# EAGLE board plugV6-Relay-NC_5x5cm_SMD0805 (EAGLE 7.5.0)
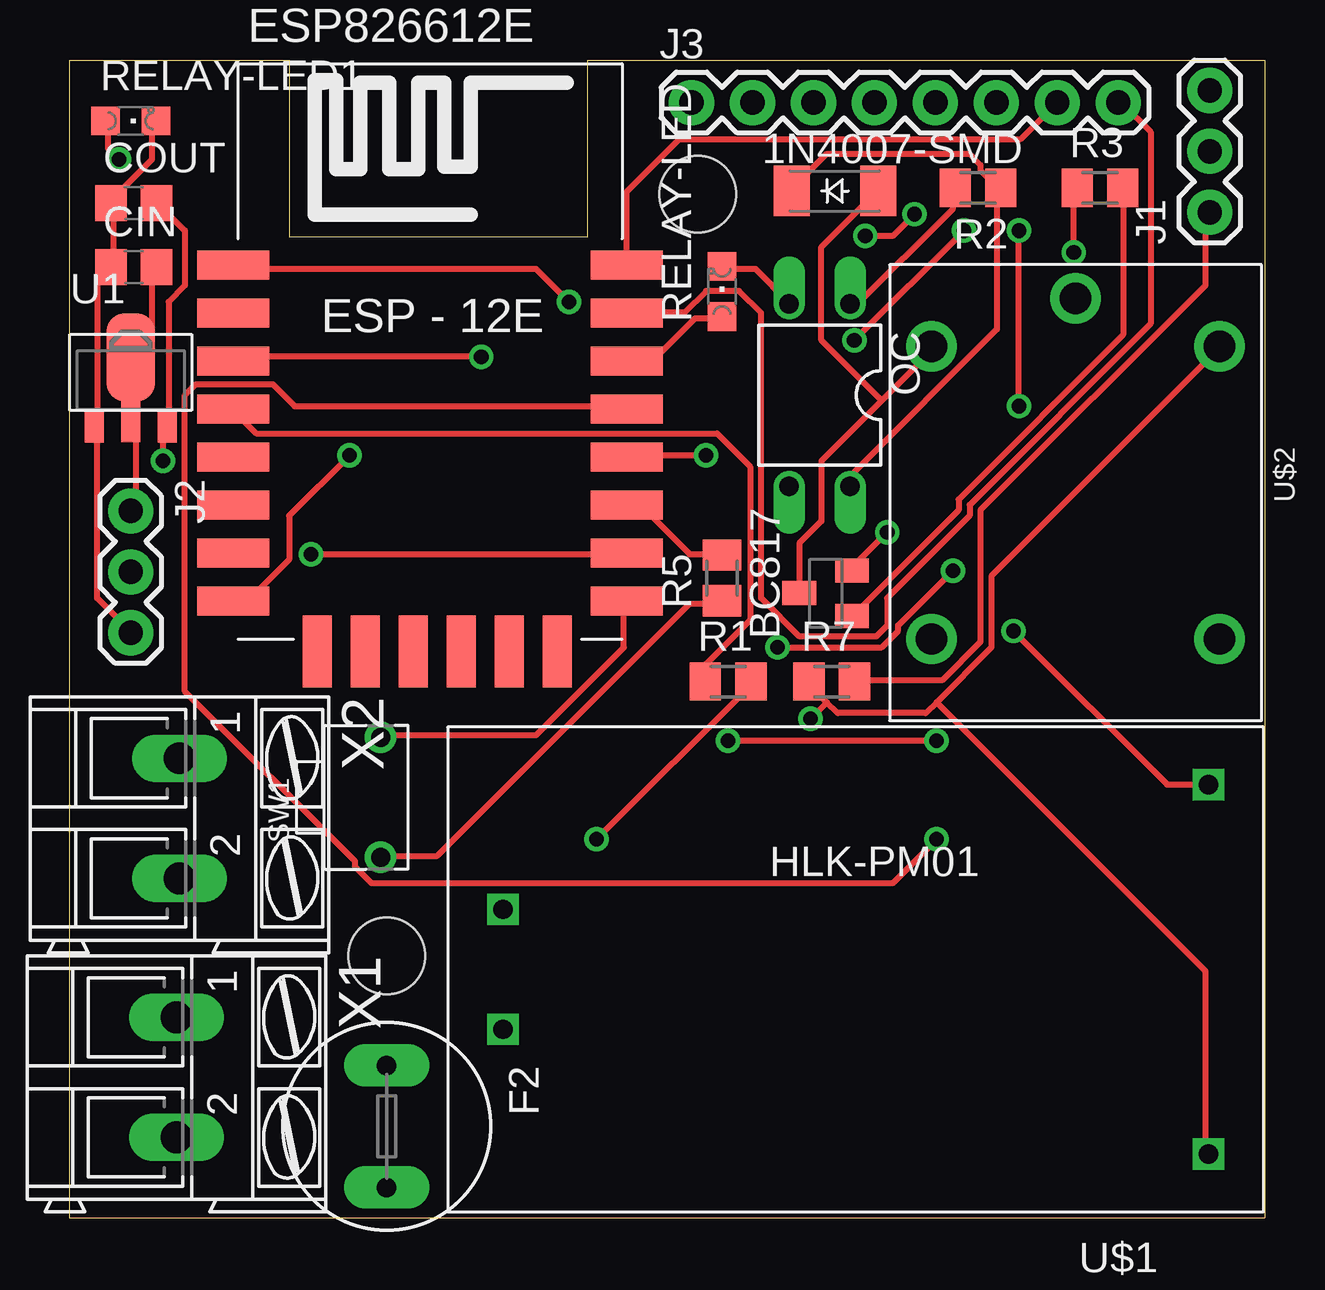
[diagram p0: board, top side]
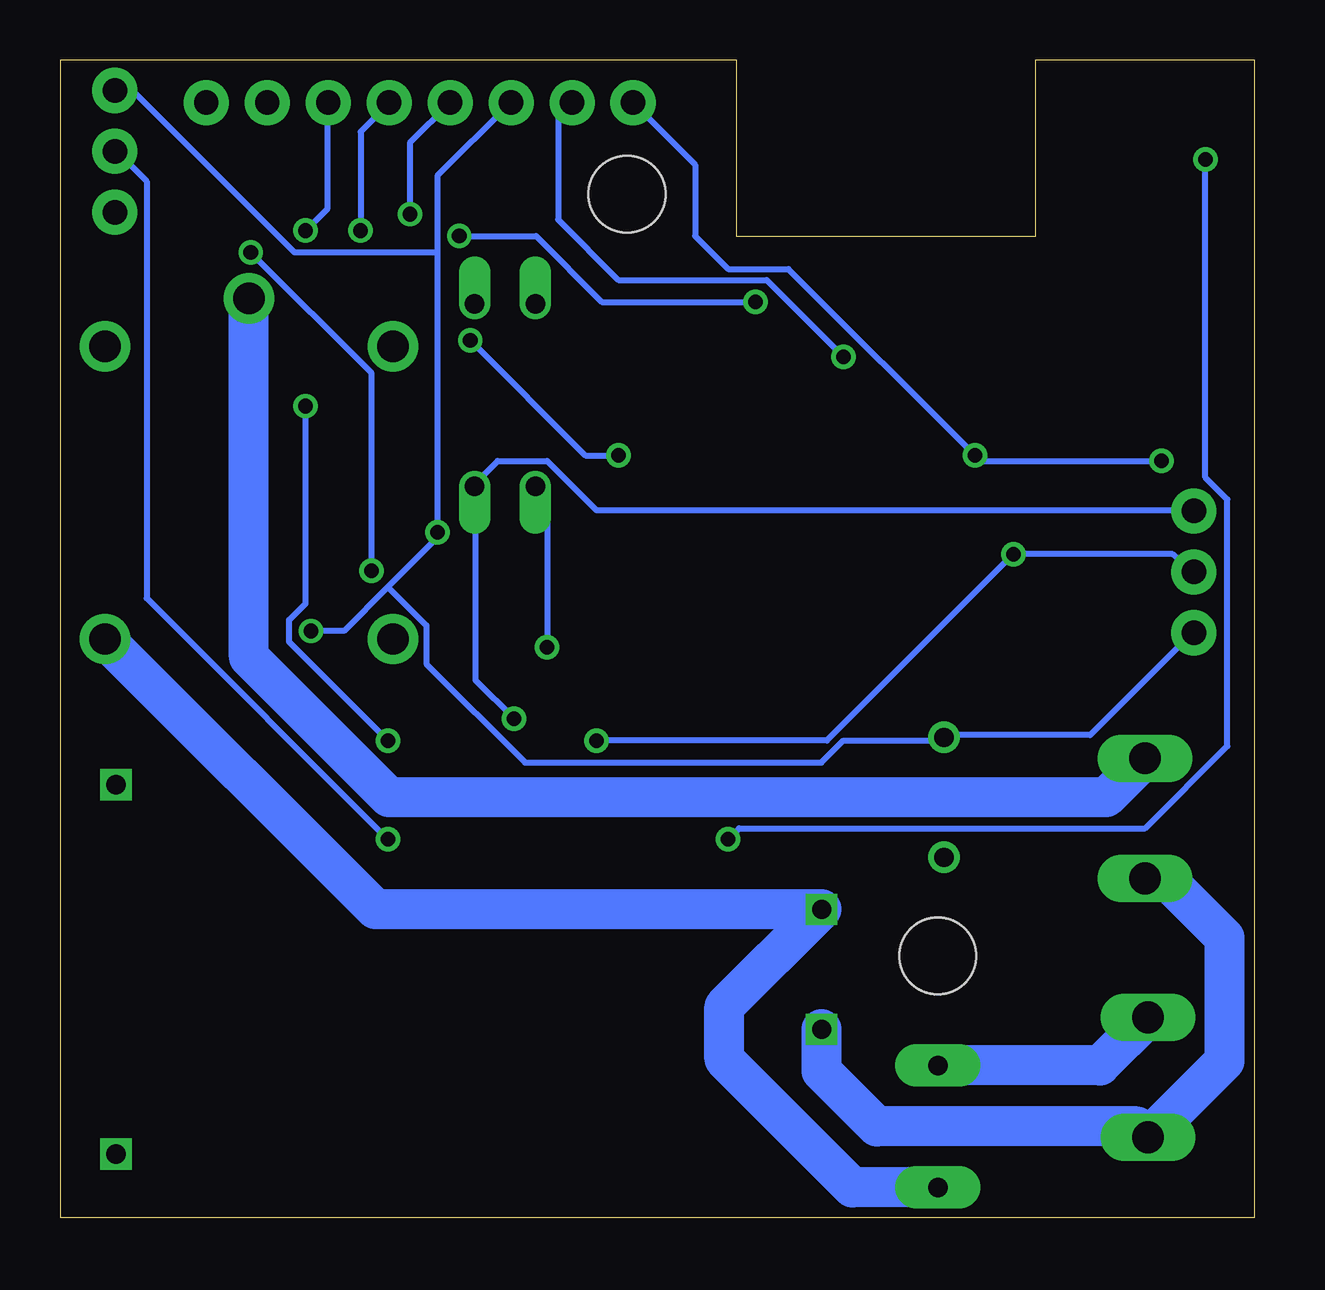
[diagram p1: board, bottom side, seen from below]

Size 49.78 x 48.26 mm. Coordinates in mm from the lower left corner, seen from the top.
Outline: 0,0 49.78,0 49.78,48.26 21.59,48.26 21.59,40.89 9.14,40.89 9.14,48.26 0,48.26 0,0
Copper layers (1*16): Top 0.035mm / dielectric 1.5mm / Bottom 0.035mm
Design rules "default": minimum track width 10mil, minimum drill 24mil, track to track 8mil, track to pad 8mil, pad to pad 8mil, via to via 8mil, smd to smd 8mil, copper to edge 40mil, drill to drill 8mil, minimum pad ring 10mil, minimum via ring 8mil, stop-mask expansion 4mil, vias tented up to drill 0mil, thermal gap 10mil
Holes 3.2 mm at 13.21,10.92 26.16,42.67

## Footprints (pad centres in the part's own frame; a part is rotated, then mirrored left to right if it is on the bottom)
SOD-123_MINI-SMA = smd 1.5 x 2.1: A 1.8,0; C -1.8,0
SOT23-BEC = smd 1 x 1.4: B -0.95,-1.1; C 0,1.1; E 0.95,-1.1
C0805 = smd 1.3 x 1.5: 1 -0.95,0; 2 0.95,0
ESP12E-SMD = smd 3 x 1.2: ADC -8.3,3.8; CH_PD -8.3,1.8; GND 8.1,-8.2; GPIO0 8.1,-2.2; GPIO2 8.1,-4.2; GPIO4 8.1,-0.2; GPIO5 8.1,1.8; GPIO12 -8.3,-4.2; GPIO13 -8.3,-6.2; GPIO14 -8.3,-2.2; GPIO15 8.1,-6.2; GPIO16 -8.3,-0.2; RESET -8.3,5.8; RXD0 8.1,3.8; TXD0 8.1,5.8; VCC -8.3,-8.2 | smd 1.2 x 3: CS0 -4.8,-10.3; GPIO9 -0.8,-10.3; GPIO10 1.2,-10.3; MISO -2.8,-10.3; MOSI 3.2,-10.3; SCLK 5.2,-10.3
TR5 = drill 0.813 pad 1.778 long: 1 -2.54,0; 2 2.54,0
1X03 = drill 1.016 pad 1.88: 1 0,0; 2 2.54,0; 3 5.08,0
1X08_ROUND = drill 1.016 pad 1.88: 1 0,0; 2 2.54,0; 3 5.08,0; 4 7.62,0; 5 10.16,0; 6 12.7,0; 7 15.24,0; 8 17.78,0
DIL04 = drill 0.813 offset: 1 -1.27,-3.81; 2 1.27,-3.81; 3 1.27,3.81; 4 -1.27,3.81
M0805 = smd 1.3 x 1.6: 1 -0.95,0; 2 0.95,0
CHIPLED_0805 = smd 1.2 x 1.2: A 0,-1.05; C 0,1.05
SW2-5.0-6.0X3.0X4.3MM = drill 0.8 pad 1.27: 1 -2.5,0; 2 2.5,0
SOT89 = smd 0.8 x 1.4: 1 -1.524,-1.905; 3 1.524,-1.905 | smd 0.8 x 1.9: 2 0,-1.651 | smd 2.032 x 3.65: 4 0,0.94
HLK-PM01 = drill 0.8 square: +5V 15.19,-7.76; AC1 -14.21,2.44; AC2 -14.21,-2.56; GND 15.19,7.64
RELAY-SONGLE = drill 1.3 pad 2.1: COM -8.1,0; NC 6.1,6; NO 6.1,-6; V+ -6.1,6; V- -6.1,-6
AK300/2 = drill 1.321 long: 1 -2.515,0; 2 2.489,0

## Placement (x,y rotation side)
1N4007-SMD  CGRM4007-G  [SOD-123_MINI-SMA]  31.88,42.8 0 top
BC817  SOT23  [SOT23-BEC]  31.5,26.04 90 top
CIN  1uF  [C0805]  2.67,39.62 0 top
COUT  1uF  [C0805]  2.67,42.29 0 top
ESP826612E  Value  [ESP12E-SMD]  15.11,33.91 0 top
F2  [TR5]  13.21,3.81 270 top
J1  [1X03]  47.5,41.91 90 top
J2  [1X03]  2.54,29.46 270 top
J3  [1X08_ROUND]  25.91,46.48 0 top
OC  PC817  [DIL04]  31.24,34.29 180 top
R1  230  [M0805]  27.43,22.35 0 top
R2  1k  [M0805]  37.85,42.93 180 top
R3  470  [M0805]  42.93,42.93 0 top
R5  470  [M0805]  27.18,26.67 90 top
R7  230  [M0805]  31.75,22.35 0 top
RELAY-LED  [CHIPLED_0805]  27.18,38.61 0 top
RELAY-LED1  ESP-LED  [CHIPLED_0805]  2.54,45.72 270 top
SW1  [SW2-5.0-6.0X3.0X4.3MM]  12.95,17.53 90 top
U1  XC6206PR  [SOT89]  2.54,34.92 0 top
U$1  HLK-PM01  [HLK-PM01]  32.26,10.41 0 top
U$2  RELAY-SONGLE  [RELAY-SONGLE]  41.91,30.23 270 top
X1  220V  [AK300/2]  4.45,5.84 270 top
X2  Plug  [AK300/2]  4.57,16.64 270 top

## Library data of the parts
1N4007-SMD = diode
BC817 = transistor-neu-to92
CIN COUT R1-R3 R5 R7 = rcl
ESP826612E = esp8266modules
F2 = fuse; OC_FARNELL: unknown; OC_NEWARK: unknown
J1 J2 = SparkFun-Connectors
J3 = SparkFun-Connectors; PROD_ID: CONN-08437
OC = optocoupler; MPN: PC817X4J000F; OC_FARNELL: 9707727; OC_NEWARK: 97K7059
RELAY-LED RELAY-LED1 = led
SW1 = Seeed-OPL-Switch
U1 = IC
U$1 = HLK-PM01
U$2 = Seeed-OPL-Relay
X1 X2 = con-ptr500; OC_FARNELL: unknown; OC_NEWARK: unknown

## Nets
+5V: 1N4007-SMD.C CIN.2 J2.1 OC.4 R2.1 R7.1 U1.2 U1.4 U$1.+5V U$2.V+
EN: ESP826612E.CH_PD J3.2
GND: BC817.E CIN.1 COUT.1 ESP826612E.GND J1.3 J2.3 J3.3 RELAY-LED1.C SW1.2 U1.1 U$1.GND
GPIO0: ESP826612E.GPIO0 J3.5
GPIO2: ESP826612E.GPIO2 R5.2
GPIO4: ESP826612E.GPIO4 J1.2
GPIO5: ESP826612E.GPIO5 RELAY-LED.A
GPIO12: ESP826612E.GPIO12
GPIO13: ESP826612E.GPIO13
GPIO14: ESP826612E.GPIO14
GPIO15: ESP826612E.GPIO15 J2.2 J3.6
GPIO16: ESP826612E.GPIO16 R1.1
N$1: F2.2 U$1.AC1 U$2.NC
N$2: OC.3 R3.1
N$3: U$1.AC2 X1.2 X2.2
N$4: U$2.COM X2.1
N$5: BC817.B R3.2
N$6: OC.2 RELAY-LED.C
N$7: R5.1 SW1.1
N$8: R1.2 RELAY-LED1.A
N$9: J1.1 R7.2
N$10: F2.1 X1.1
N$13: OC.1 R2.2
N$18: 1N4007-SMD.A BC817.C U$2.V-
RST: ESP826612E.RESET J3.4
RX: ESP826612E.RXD0 J3.8
TX: ESP826612E.TXD0 J3.7
V33: COUT.2 ESP826612E.VCC J3.1 U1.3

## Tracks (layer width: path | path; a pad name or v marks a point on that pad's centre or on a via)
+5V  (via drill 0.61)
  Top 0.254: CIN.2 3.43,39.55 3.43,36.58 2.74,35.89 U1.4 2.52,35.66 2.52,33.38 U1.2 2.74,33.15 2.74,29.49 J2.1 | 1N4007-SMD.C 30.18,42.98 31.55,44.35 37.49,44.35 37.95,43.89 37.95,43.66 38.63,42.98 R2.1 38.63,42.75 38.63,37.03 32.69,31.09 32.69,30.63 OC.4 | 31.55,21.49 32,21.03 35.66,21.03 36.12,21.49 | 31.55,21.49 30.86,22.17 R7.1 | 36.12,21.49 38.41,23.77 38.41,26.75 47.78,36.12 U$2.V+ | 36.12,21.49 47.32,10.29 47.32,2.74 U$1.+5V | 31.55,21.49 v30.86,20.8
  Bottom 0.254: J2.1 2.74,29.49 27.43,29.49 29.49,31.55 31.55,31.55 32.46,30.63 OC.4 32.46,30.4 32.46,22.4 v30.86,20.8
EN  (via drill 0.61)
  Top 0.254: v17.14,35.89 6.86,35.89 ESP826612E.CH_PD
  Bottom 0.254: v17.14,35.89 20.34,39.09 26.52,39.09 29.03,41.6 29.03,45.95 28.57,46.41 J3.2
GND  (via drill 0.61)
  Top 0.254: RELAY-LED1.C 3.43,45.72 3.43,44.12 1.6,42.29 COUT.1 1.83,42.29 1.83,39.78 CIN.1 1.6,39.55 1.14,39.09 1.14,33.15 U1.1 1.14,32.92 1.14,25.83 2.52,24.46 J2.3 | ESP826612E.GND 23.09,25.6 23.09,23.77 19.43,20.12 13.03,20.12 SW1.2 | v34.06,28.57 32.69,27.2 BC817.E | v39.32,24.46 45.72,18.06 47.32,18.06 U$1.GND
  Bottom 0.254: J2.3 2.74,24.23 6.86,20.12 12.8,20.12 SW1.2 13.03,19.89 17.14,19.89 18.06,18.97 30.4,18.97 34.52,23.09 34.52,24.69 36.12,26.29 | 34.06,40.23 34.06,43.43 31.09,46.41 J3.3 | 34.06,40.23 v34.06,28.57 34.06,28.35 36.12,26.29 | v39.32,24.46 37.95,24.46 36.12,26.29 | 34.06,40.23 40.01,40.23 46.63,46.86 47.32,46.86 J1.3
GPIO0  (via drill 0.61)
  Top 0.254: v26.52,31.77 23.32,31.77 ESP826612E.GPIO0 | v37.26,41.15 v32.69,36.58
  Bottom 0.254: v26.52,31.77 27.89,31.77 v32.69,36.58 | v37.26,41.15 37.26,45.26 36.12,46.41 J3.5
GPIO2
  Top 0.254: R5.2 26.98,27.66 25.83,27.66 24,29.49 23.32,29.49 ESP826612E.GPIO2
GPIO4  (via drill 0.61)
  Top 0.254: v36.12,15.77 34.29,13.95 12.57,13.95 11.89,14.63 11.89,14.86 4.8,21.95 4.8,34.29 5.26,34.75 8.46,34.75 9.37,33.83 23.09,33.83 ESP826612E.GPIO4
  Bottom 0.254: v36.12,15.77 46.18,25.83 46.18,43.2 47.32,44.35 J1.2
GPIO5
  Top 0.254: RELAY-LED.A 26.98,37.49 26.06,37.49 24.46,35.89 23.32,35.89 ESP826612E.GPIO5
GPIO15  (via drill 0.61)
  Top 0.254: v10.06,27.66 23.09,27.66 ESP826612E.GPIO15 | v39.55,33.83 v39.55,41.15 | v27.43,19.89 v36.12,19.89
  Bottom 0.254: J2.2 2.74,26.98 3.43,27.66 v10.06,27.66 17.83,19.89 v27.43,19.89 | v39.55,41.15 38.63,42.06 38.63,46.41 J3.6 | v39.55,33.83 39.55,25.6 40.23,24.92 40.23,24 v36.12,19.89
GPIO16
  Top 0.254: R1.1 26.52,22.4 26.52,23.09 28.35,24.92 28.35,31.32 26.98,32.69 7.77,32.69 6.86,33.6 ESP826612E.GPIO16
N$1
  Bottom 1.676: F2.2 16.76,1.27 22.1,6.6 22.1,8.8 U$1.AC1 36.64,12.85 U$2.NC
N$2  (via drill 0.61)
  Top 0.254: v41.83,40.23 41.83,42.75 R3.1 | v36.8,26.98 34.52,24.69 34.52,24.46 33.83,23.77 v29.49,23.77
  Bottom 0.254: v41.83,40.23 36.8,35.2 v36.8,26.98 | v29.49,23.77 29.49,29.95 29.95,30.4 OC.3
N$3
  Bottom 1.676: X2.2 3.73,14.15 1.27,11.68 1.27,6.53 X1.2 4.9,3.81 15.75,3.81 18.05,6.11 U$1.AC2
N$4
  Bottom 1.676: X2.1 6.2,17.53 36.07,17.53 41.91,23.37 U$2.COM
N$5
  Top 0.254: BC817.B 32.69,25.15 37.03,29.49 37.03,29.95 43.89,36.8 43.89,42.75 R3.2
N$6
  Top 0.254: RELAY-LED.C 27.2,39.55 28.57,39.55 29.95,38.18 OC.2
N$7
  Top 0.254: R5.1 26.98,25.6 25.83,25.6 15.32,15.09 13.03,15.09 SW1.1
N$8  (via drill 0.61)
  Top 0.254: v2.06,44.12 1.6,44.58 1.6,45.72 RELAY-LED1.A | v21.95,15.77 28.35,22.17 R1.2
  Bottom 0.254: v2.06,44.12 2.06,30.86 1.14,29.95 1.14,19.66 4.57,16.23 21.49,16.23 v21.95,15.77
N$9
  Top 0.254: R7.2 32.92,22.4 36.35,22.4 37.95,24 37.95,29.49 47.32,38.86 47.32,41.83 J1.1
N$10
  Bottom 1.676: X1.1 6.45,6.35 F2.1
N$13
  Top 0.254: R2.2 36.8,42.75 36.8,42.06 32.69,37.95 OC.1
N$18
  Top 0.254: 33.83,34.06 35.89,36.12 U$2.V- | 33.83,34.06 31.32,31.55 31.32,29.03 30.4,28.12 30.4,26.06 BC817.C | 33.83,34.06 31.32,36.58 31.32,40.46 33.6,42.75 1N4007-SMD.A
RST  (via drill 0.61)
  Top 0.254: v20.8,38.18 19.43,39.55 6.86,39.55 ESP826612E.RESET | v33.15,40.92 34.29,40.92 v35.2,41.83
  Bottom 0.254: v20.8,38.18 27.2,38.18 29.95,40.92 v33.15,40.92 | v35.2,41.83 35.2,44.81 J3.4
RX
  Top 0.254: ESP826612E.RXD0 23.32,37.72 25.6,37.72 26.52,38.63 27.89,38.63 28.8,37.72 28.8,25.83 30.4,24.23 33.6,24.23 34.06,24.69 34.06,25.83 37.49,29.26 37.49,29.72 45.03,37.26 45.03,45.26 43.89,46.41 J3.8
TX
  Top 0.254: ESP826612E.TXD0 23.21,42.77 25.4,44.96 39.62,44.96 J3.7
V33  (via drill 0.61)
  Top 0.254: COUT.2 3.66,42.29 4.8,41.15 4.8,38.86 4.12,38.18 4.12,33.15 U1.3 3.89,32.92 v3.89,31.55 | v11.66,31.77 9.14,29.26 9.14,27.43 7.54,25.83 6.86,25.83 ESP826612E.VCC
  Bottom 0.254: J3.1 23.32,43.89 23.32,40.92 21.95,39.55 19.43,39.55 v11.66,31.77 11.43,31.55 v3.89,31.55